# Altium PCB as5311-module.PcbDoc
Units mm, origin at the board's own origin, x right, y up, seen from the top; angles counter-clockwise.
Board outline 25 x 25 mm, 2 copper layers (Top Layer, Bottom Layer); 17 components, 19 nets, 107 pads, 14 vias.
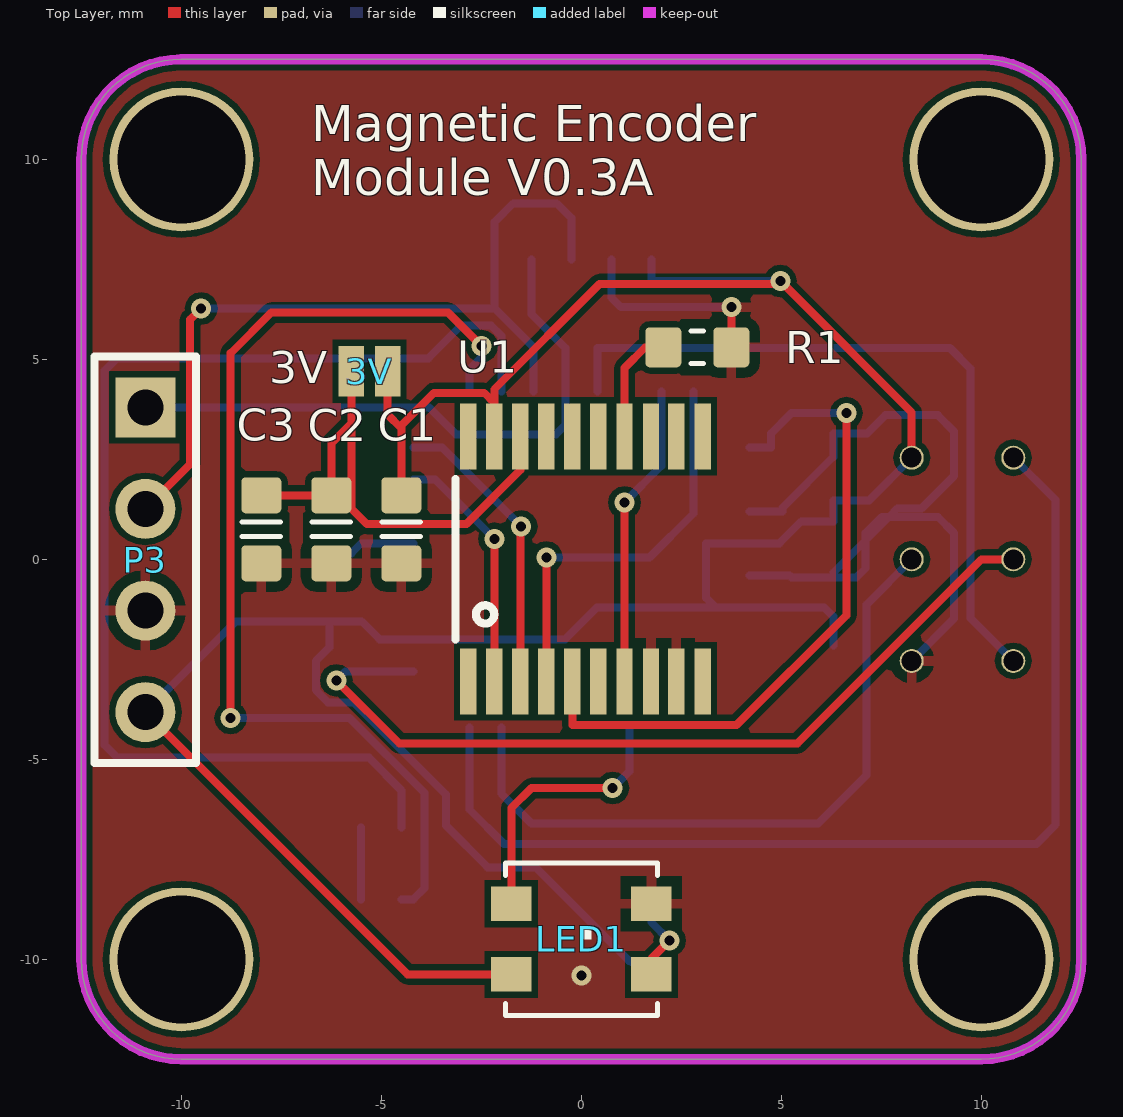
[diagram p0: Top Layer view]
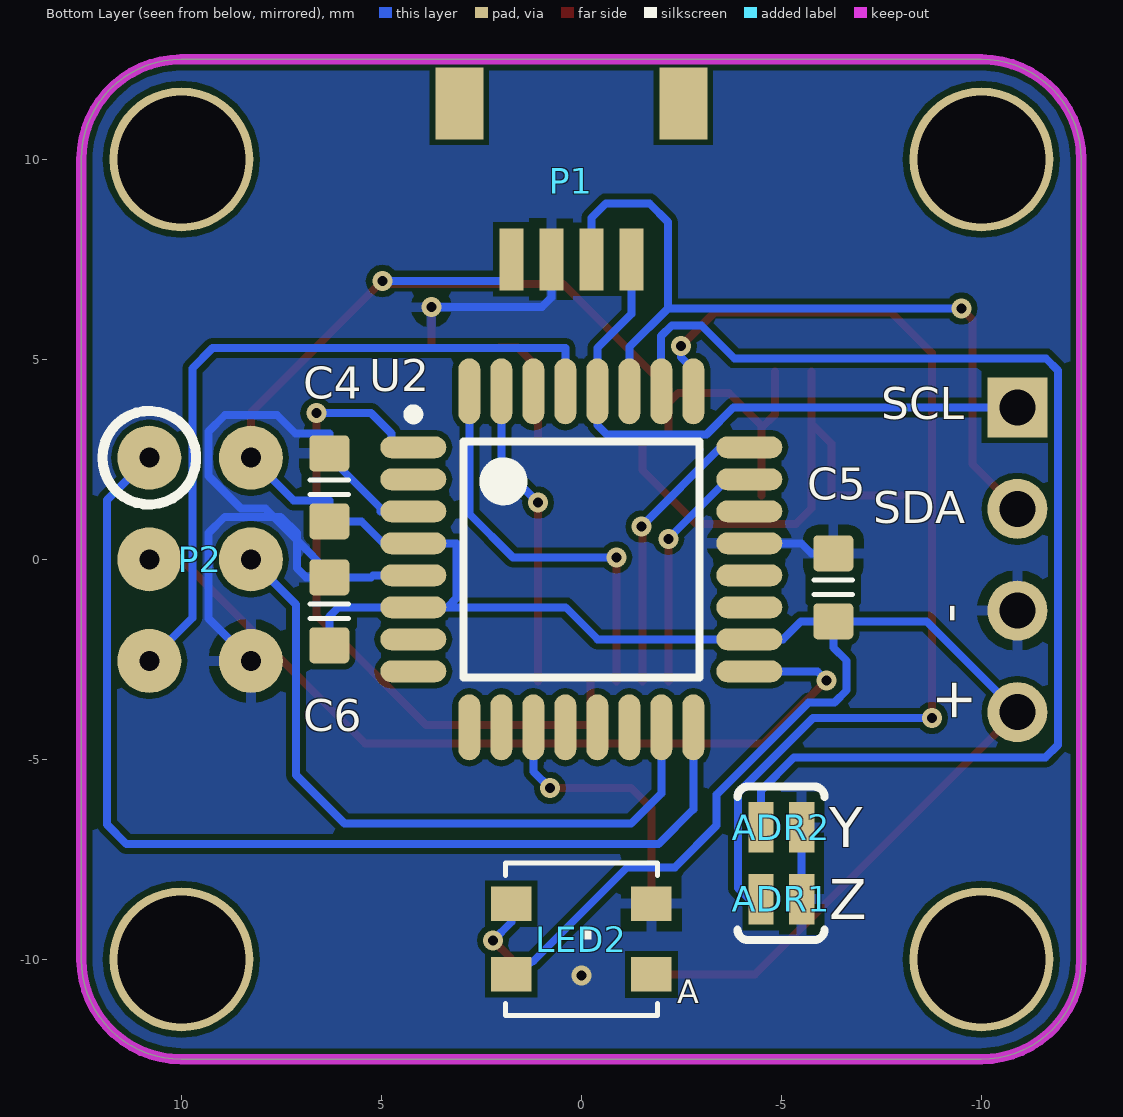
[diagram p1: Bottom Layer view, seen from below]
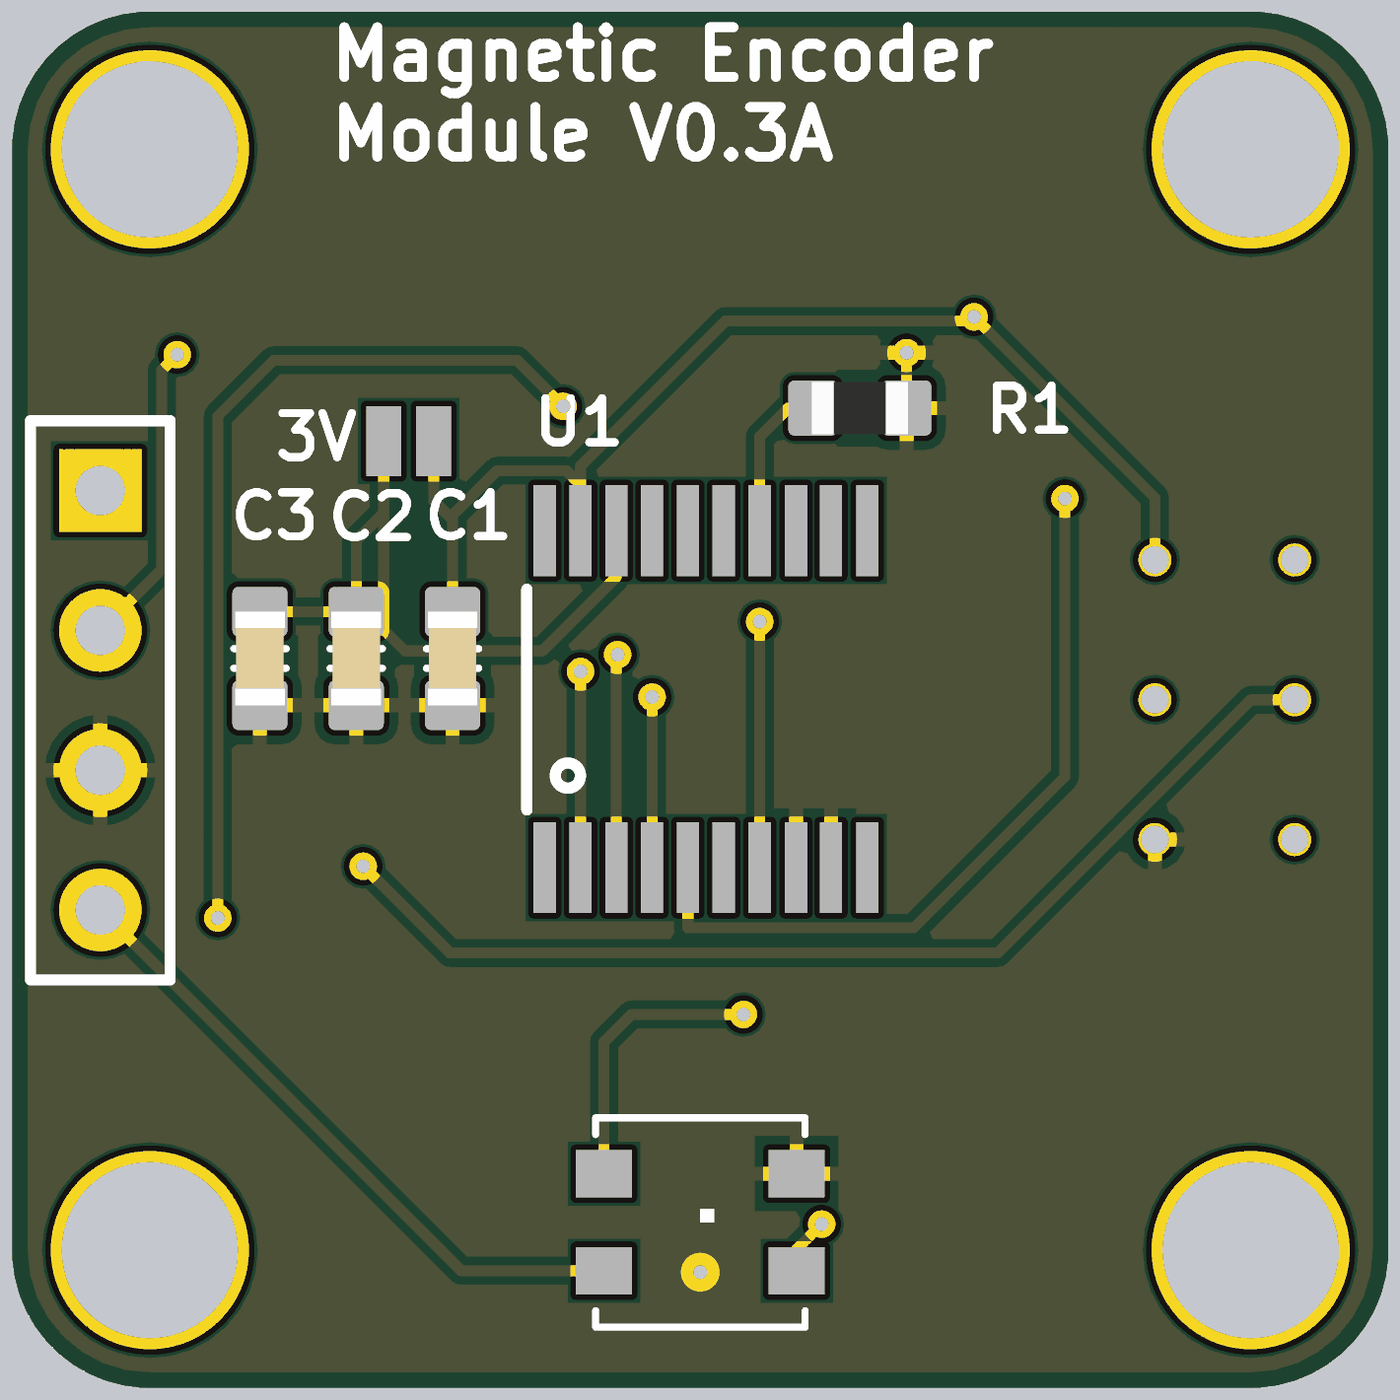
[diagram p2: 3D render of the assembled board from above, using the file's embedded part models]

## Layer stack, top to bottom
Top Solder: solder mask 0.0102, Solder Resist, Dk 3.5
Top Layer: signal copper 0.0356
Dielectric1: dielectric 0.32, FR-4, Dk 4.8
Bottom Layer: signal copper 0.0356
Bottom Solder: solder mask 0.0102, Solder Resist, Dk 3.5

## Board outline
-12.5,-10 -12.5,10 cw(c-10,10) -10,12.5 10,12.5 cw(c10,10) 12.5,10 12.5,-10 cw(c10,-10) 10,-12.5 -10,-12.5 cw(c-10,-10)

## Design rules (kind name [scope] priority, off if disabled: settings)
Clearance [All] p1: gap=0.15
FabricationTestPointUsage TestPointUsage [All] p1: valid=0 allowmultiple=FALSE
FabricationTestpoint Testpoint [All] p1: side=3 testpointundercomponent=TRUE minsize=1.016 maxsize=2.54 preferedsize=1.524 minholesize=0 maxholesize=1.016 preferedholesize=0.813 testpointgrid=0.025 allowsidetop=TRUE allowsidebottom=TRUE usegrid=TRUE gridtolerance=0
HoleSize [All] p1: absolutevalues=TRUE maxlimit=3.5 minlimit=0.025 maxpercent=80.000 minpercent=20.000
PolygonConnect [All] p1: connectstyle=Relief reliefconductorwidth=0.254 reliefentries=4 polygonreliefangle="90 Angle" airgapwidth=0.254
RoutingVias [All] p1: holewidth=0.25 width=0.5 viastyle="Through Hole" minholewidth=0.25 minwidth=0.5 maxholewidth=1 maxwidth=1.4
SilkToSolderMaskClearance SilkscreenOverComponentPads [IsPad] p1: minsilkscreentomaskgap=0.254 clearancetoexposedcopper=TRUE
SolderMaskExpansion [All] p1: expansion=0.102
Width [All] p1: maxlimit=1 minlimit=0.2 preferedwidth=0.2 minimp=50.000000 maximp=50.000000 favimp=50.000000
26 further rules are at their usual default settings.

## Classes and differential pairs
component class as5311-module: 3V ADR1 ADR2 C1 C2 C3 C4 C5 C6 LED1 LED2 P1 P3 R1 U1 U2

## Components (designator, comment, footprint, x,y, rotation, side; value= is the part's Value field where it differs from the comment)
3V "JUMPER-PAD-2-NO" PAD-JUMPER-2-NO_NO_SILK -5.3,4.7 r0 top
ADR1 "JUMPER-PAD-2-NC_BY_TRACE" PAD-JUMPER-2-NC_BY_TRACE_YES_SILK -5,-8.5 r0 bottom
ADR2 "JUMPER-PAD-2-NC_BY_TRACE" PAD-JUMPER-2-NC_BY_TRACE_YES_SILK -5,-6.7 r0 bottom
C1 "approved sub OK" CAPC1608X90N -4.5,0.75 r270 top
C2 "approved sub OK" CAPC1608X90N -6.25,0.75 r270 top
C3 "approved sub OK" CAPC1608X90N -8,0.75 r270 top
C4 "approved sub OK" CAPC1608X90N 6.3,1.8 r90 bottom
C5 "approved sub OK" CAPC1608X90N -6.3,-0.7 r90 bottom
C6 "approved sub OK" CAPC1608X90N 6.3,-1.3 r90 bottom
LED1 "WS2812B3535" LED3535 0,-9.5 r0 top
LED2 "WS2812B3535" LED3535 0,-9.5 r180 bottom
P1 "JST-SH 4P" SM04B-SRSS-TB 1.75,7.5 r90 bottom
P2 "ICSP" "ICSP Pads - SMD" 10.8,2.54 r180 bottom
P3 "Header 4" HDR1X4 -10.9,3.8 r270 top
R1 "Thick Film" RESC1608X55N 2.9,5.3 r0 top
U1 "AS5311" TSSOP-20 0.75,0 r0 top
U2 "ATmega328-AU" 32A_N 0,0 r180 bottom

## Footprints (in the part's own frame and the unit in brackets; to place one, negate y for a bottom-side part, rotate by r counter-clockwise, add the part's x,y. Pads: shape width x height; smd on the part's side, far side on the other; paste and mask are expansions set on the pad)
32A_N [mm] "Thin QFP, 32-Leads, Body 7x7mm, Pitch 0.8mm, IPC Medium Density"
  oval 1.65x0.55 smd: 1(-4.2,2.8) 2(-4.2,2) 3(-4.2,1.2) 4(-4.2,0.4) 5(-4.2,-0.4) 6(-4.2,-1.2) 7(-4.2,-2) 8(-4.2,-2.8) 17(4.2,-2.8) 18(4.2,-2) 19(4.2,-1.2) 20(4.2,-0.4) 21(4.2,0.4) 22(4.2,1.2) 23(4.2,2) 24(4.2,2.8)
  oval 0.55x1.65 smd: 9(-2.8,-4.2) 10(-2,-4.2) 11(-1.2,-4.2) 12(-0.4,-4.2) 13(0.4,-4.2) 14(1.2,-4.2) 15(2,-4.2) 16(2.8,-4.2) 25(2.8,4.2) 26(2,4.2) 27(1.2,4.2) 28(0.4,4.2) 29(-0.4,4.2) 30(-1.2,4.2) 31(-2,4.2) 32(-2.8,4.2)
  silkscreen extent -4.33,-2.95 2.95,3.75, body extent -3.5,-3.5 3.5,3.5, height 1.2
CAPC1608X90N [mm] "Chip Capacitor, Body 1.6x0.8mm, EIA 0603, IPC Medium Density"
  round 0.254 on Mech15: 0(0,0)
  rrect25% 0.9x1 smd: 1(-0.85,0) 2(0.85,0)
  Top Layer pour cut-out: -0.6,0.5 -0.4,0.7 0.4,0.7 0.6,0.5 0.6,-0.5 0.4,-0.7 -0.4,-0.7 -0.6,-0.5
  silkscreen extent -0.18,-0.48 0.18,0.48, body extent -0.85,-0.45 0.85,0.45, height 0.89
HDR1X4 [mm] "Connector; Header; 4 Position"
  rect 1.5x1.5 hole 0.9: 1(0,0)
  round 1.5 hole 0.9: 2(2.54,0) 3(5.08,0) 4(7.62,0)
  silkscreen extent -1.27,-1.27 8.89,1.27
"ICSP Pads - SMD" [mm]
  round 1.6 / inner round 1.6 / far side round 0.6 hole 0.5: 1(0,0) 2(2.54,0) 3(0,-2.54) 4(2.54,-2.54) 5(0,-5.08) 6(2.54,-5.08)
  silkscreen extent -1.17,-1.17 1.17,1.17
LED3535 [mil]
  rect 40x34 smd: 1(-68.9,35) 2(-68.9,-34.45) 3(69,-34.45) 4(69,35)
  silkscreen extent -75,-75 75,75
PAD-JUMPER-2-NC_BY_TRACE_YES_SILK [mm]
  rect 0.635x1.27 smd: 1(-0.508,0) 2(0.508,0)
  silkscreen extent -1.08,0.76 1.09,1.02
PAD-JUMPER-2-NO_NO_SILK [mm]
  rect 0.635x1.27 smd: 1(-0.45,0) 2(0.457,0)
RESC1608X55N [mm] "Chip Resistor, Body 1.6x0.8mm, EIA 0603, IPC Medium Density"
  round 0.254 on Mech15: 0(0,0)
  rrect25% 0.9x1 smd: 1(-0.85,0) 2(0.85,0)
  Top Layer pour cut-out: -0.6,0.5 -0.4,0.7 0.4,0.7 0.6,0.5 0.6,-0.5 0.4,-0.7 -0.4,-0.7 -0.6,-0.5
  silkscreen extent -0.15,-0.41 0.15,0.41, body extent -0.87,-0.47 0.88,0.48, height 0.54
SM04B-SRSS-TB [mm]
  rect 1.55x0.6 smd: 0(0,0) 1(0,-1) 2(0,-2) 3(0,-3)
  rect 1.8x1.2 smd: ""(3.9,-4.3) ""(3.9,1.3)
  body extent -0.55,-4.5 4.4,1.5, height 2.96
TSSOP-20 [mil]
  rect 16x65 smd: 1(-140.75,-120.08) 2(-115.16,-120.08) 3(-89.57,-120.08) 4(-63.98,-120.08) 5(-38.39,-120.08) 6(-12.8,-120.08) 7(13,-120.08) 8(39,-120.08) 9(64,-120.08) 10(90,-120.08) 11(90,121) 12(64,121) 13(39,121) 14(13,121) 15(-12.8,121) 16(-38.39,121) 17(-63.98,121) 18(-89.57,121) 19(-115.16,121) 20(-140.75,121)
  silkscreen extent -154,-79 -115,79

## Part data
C1 C2 C4 C5 C6: library part CAPC_100n_0603_X7R_50V_10%, "Capacitor SMD Cer 100nF 10% 50V X7R 0603"
C3: library part CAPC_1u_0603_X7R_16V_10%, "Capacitor SMD Cer 1uF 10% 16V X7R 0603"
P1: library part SM04B-SRSS-TB
P2: library part "Header 3X2", "Header, 3-Pin, Dual row"
P3: "Header, 4-Pin"
R1: library part RES_1K_0603_5%, "Resistor SMD chip 1k Ohm 0.1W 5% 0603"
U1: "AMS's AS5311 linear hall-effect encoder."
U2: "8-bit AVR Microcontroller, 32KB Flash, 1KB EEPROM, 2KB SRAM, 32-pin TQFP, Industrial Grade (-40°C to 85°C)"

## Free pads (board coordinates)
  round 3.6 hole 3.2: 0(-10,-10) 0(-10,10) 0(10,-10) 0(10,10)

## Via types
v1: diameter 0.5, hole 0.25, Top Layer to Bottom Layer, 14 vias

## Nets (pads, with @x,y where several pads share a name; then routed paths per layer and width w, separated by ;. In a path a pad name is that pad's centre, name@x,y a point inside that pad or via, vN(x,y) a via of type N, cw(c..) or ccw(c..) an arc to the next point about the centre after c; other vN are vias at no path point)
A: U1.4 U2.32 | length 10.3
  Top Layer w0.2: U1.4 v1(-0.875,0.048)
  Bottom Layer w0.2: v1(-0.875,0.048) 1.708,0.048 2.8,1.14 U2.32
ADR1: ADR1.2 U2.25 | length 26.1
  Top Layer w0.2: v1(-8.766,-3.966) -8.766,5.153 -7.75,6.169 -3.331,6.169 v1(-2.492,5.331)
  Bottom Layer w0.2: v1(-8.766,-3.966) -5.794,-3.966 -3.915,-5.845 -3.915,-8.215 -4.2,-8.5 ADR1.2 ; U2.25 -2.8,4.747 -2.492,5.054 v1(-2.492,5.331)
ADR2: ADR2.2 U2.26 | length 30.1
  Bottom Layer w0.2: ADR2.2 -4.492,-5.776 -5.312,-4.956 -11.6,-4.956 -11.916,-4.64 -11.916,4.721 -11.611,5.026 -3.825,5.026 -3,5.851 -2.264,5.851 -1.992,5.58 -1.992,4.838 -2,4.831 U2.26
B: U1.5 U2.1 | length 17.1
  Top Layer w0.2: U1.5 -0.225,-4.143 3.883,-4.143 6.626,-1.4 v1(6.626,3.654)
  Bottom Layer w0.2: U2.1 4.747,2.8 4.747,3.146 5.255,3.654 v1(6.626,3.654)
GND: ADR1.1 ADR2.1 C1.2 C2.2 C3.2 C4.2 C5.2 C6.2 LED1.4 LED2.4 P1.1 P2.6 P3.3 R1.2 U1.8 U1.9 U2.3 U2.5 U2.21 | length 31.1
  Top Layer w0.2: R1.2 v1(3.75,6.305)
  Bottom Layer w0.2: C5.2 -5.75,0.15 -5.5,0.4 U2.21 ; ADR1.1 ADR2.1 ; P1.1 0.75,6.542 0.987,6.305 v1(3.75,6.305) ; U2.5 5.204,-0.4 5.254,-0.45 C6.2 ; U2.3 5.026,1.2 5.026,1.288 6.3,2.562 C4.2 6.3,3.14 7.14,3.14 7.603,3.604 8.912,3.604 9.319,3.197 9.319,2.08 8.506,1.267 7.9,1.267 7.697,1.064 ; P2.6 9.319,-1.481 9.319,0.657 8.912,1.064 7.697,1.064 ; C6.2 6.88,-0.45 7.109,-0.221 7.109,0.475 ; C6.2 6.3,-0.333 7.109,0.475 ; 7.109,0.475 7.697,1.064 ; 7.109,0.475 7.109,0.657 7.515,1.064 7.697,1.064
  other v1: 0,-10.4
I: U1.7 U2.31 | length 7.6
  Top Layer w0.2: U1.7 v1(1.08,1.419)
  Bottom Layer w0.2: v1(1.08,1.419) 2,2.339 U2.31
MAGDECN: U1.3 U2.24 | length 7.4
  Top Layer w0.2: U1.3 -1.525,0.796 v1(-1.502,0.819)
  Bottom Layer w0.2: U2.24 -3.483,2.8 v1(-1.502,0.819)
MAGINCN: U1.2 U2.23 | length 6.2
  Top Layer w0.2: U1.2 v1(-2.175,0.514)
  Bottom Layer w0.2: U2.23 -3.661,2 v1(-2.175,0.514)
MISO: P2.1 U2.16 | length 26.9
  Bottom Layer w0.2: U2.16 -2.8,-6.249 -1.934,-7.115 11.376,-7.115 11.859,-6.633 11.859,1.481 P2.1
MOSI: P2.4 U2.15 | length 17.5
  Bottom Layer w0.2: U2.15 -2,-5.855 -1.248,-6.607 5.922,-6.607 7.134,-5.395 7.134,-1.126 P2.4
Net3V_1: 3V.1 C2.1 C3.1 U1.18 | length 13
  Top Layer w0.2: C3.1 C2.1 -6.25,2.892 -5.75,3.392 ; 3V.1 -5.75,3.392 ; U1.18 -1.525,2.234 -2.873,0.886 -5.363,0.886 -5.75,1.273 -5.75,3.392
NetLED1_3: LED1.3 LED2.1 | length 2.1
  Top Layer w0.2: LED1.3 1.753,-9.982 v1(2.207,-9.528)
  Bottom Layer w0.2: LED2.1 1.75,-9.072 v1(2.207,-9.528)
NetR1_1: R1.1 U1.14 | length 2.9
  Top Layer w0.2: U1.14 1.08,4.783 1.597,5.3 R1.1
RST: P2.5 U2.29 | length 18.4
  Bottom Layer w0.2: U2.29 0.4,5.28 9.217,5.28 9.725,4.772 9.725,-1.465 P2.5
SCK: P2.3 U2.17 | length 21.5
  Top Layer w0.2: v1(-6.125,-3.026) -4.55,-4.601 5.407,-4.601 10.008,0 P2.3
  Bottom Layer w0.2: v1(-6.125,-3.026) -5.899,-2.8 U2.17
SCL: P1.3 P3.1 U2.28 | length 15.4
  Bottom Layer w0.2: P3.1 -3.806,3.8 -3.127,3.121 -0.638,3.121 -0.4,3.359 U2.28 -0.4,5.28 -1.25,6.13 P1.3
SDA: P1.2 P3.2 U2.27 | length 20.9
  Top Layer w0.2: P3.2 -9.782,2.378 -9.782,5.991 v1(-9.503,6.271)
  Bottom Layer w0.2: v1(-9.503,6.271) -2.165,6.271 ; U2.27 -1.2,5.305 -2.165,6.271 ; P1.2 -0.25,8.531 -0.619,8.9 -1.7,8.9 -2.165,8.435 -2.165,6.271
VCC: 3V.2 C1.1 C4.1 C5.1 C6.1 LED1.2 LED2.2 P1.0 P2.2 P3.4 U1.19 U2.4 U2.6 U2.18 | length 78.1
  Top Layer w0.2: P3.4 -4.345,-10.375 LED1.2 ; 3V.2 -4.843,3.617 -4.5,3.275 ; C1.1 -4.5,3.275 ; U1.19 -2.175,3.908 ; v1(4.975,6.956) v1@5.051,6.88 ; P2.2 8.26,3.672 v1@5.051,6.88 ; -4.5,3.275 -4.5,3.349 -3.686,4.162 -2.429,4.162 -2.175,3.908 ; -2.175,3.908 -2.175,4.251 0.454,6.88 v1@5.051,6.88
  Bottom Layer w0.2: P3.4 -8.63,-1.55 C5.1 ; LED2.2 1.191,-10.036 -1.146,-7.699 -2.34,-7.699 -3.381,-6.658 -3.381,-5.884 -5.685,-3.58 -6.328,-3.58 -6.634,-3.273 -6.634,-2.538 -6.3,-2.203 C5.1 ; P1.0 1.75,6.956 v1(4.975,6.956) ; C6.1 6.3,-1.433 6.067,-1.2 U2.6 3.353,-1.2 ; P2.2 7.19,1.47 6.3,1.47 C4.1 5.5,0.95 4.95,0.4 U2.4 3.121,0.4 3.121,-0.968 3.353,-1.2 ; C5.1 -5.49,-1.55 -5.04,-2 U2.18 -0.41,-2 0.39,-1.2 3.353,-1.2
WS2812B: LED1.1 U2.11 | length 6.8
  Top Layer w0.2: LED1.1 -1.75,-6.22 -1.248,-5.718 v1(0.784,-5.718)
  Bottom Layer w0.2: v1(0.784,-5.718) 1.2,-5.302 U2.11
pads on no net: C1.0 C2.0 C3.0 C4.0 C5.0 C6.0 LED2.3 P1. R1.0 U1.1 U1.6 U1.10 U1.11 U1.12 U1.13 U1.15 U1.16 U1.17 U1.20 U2.2 U2.7 U2.8 U2.9 U2.10 U2.12 U2.13 U2.14 U2.19 U2.20 U2.22 U2.30

## Polygon pours and split planes (outlines as drawn)
GND on Bottom Layer "Bottom Layer-GND" (solid, pour order 0): 12.5,12.5 12.5,-12.5 -12.5,-12.5 -12.5,12.5
GND on Top Layer "Top VCC" (solid, pour order 2): 12.5,12.5 12.5,-12.5 -12.5,-12.5 -12.5,12.5

## Keep-outs
Keep-Out Layer:
  the board outline again, w0.254

## Silkscreen, mask and mechanical layers (free items; w line width, h text height)
Top Overlay:
  text "Magnetic Encoder / Module V0.3A" at -6.75,9.1 h0.9
  text "3V" at -7.8,4.4 h0.8
Bottom Overlay:
  text "SCL" at -7.5,3.5 h0.8
  text "SDA" at -7.3,0.9 h0.8
  text "-" at -8.9,-1.6 h1 r90
  text "+" at -8.9,-4.1 h1 r90
  text "Y" at -6.2,-7.2 h1
  text "Z" at -6.2,-9 h1
  text "A" at -2.4,-11.3 h1
Bottom Solder:
  rectangle: -5.3,-6.9 -4.8,-6.5
  rectangle: -5.3,-8.7 -4.8,-8.3
Mechanical 4:
  lines w0.254: 0,0 12.5,0
Mechanical 16:
  drawing of 1878 lines, arcs and shapes, not listed
  text "1" at -97.285,82.369 h1.78
  text "2" at -24.641,82.369 h1.78
  text "3" at 48.511,82.369 h1.78
  text "4" at 121.409,82.369 h1.78
  text "A" at -131.626,59.357 h1.78
  text "A" at 155.394,59.357 h1.78
  text "B" at -131.626,11.3 h1.78
  text "B" at 155.394,11.3 h1.78
  text "C" at -131.626,-37.214 h1.78
  text "C" at 155.394,-37.214 h1.78
  text "ENGINEER:" at 40.459,-74.222 h1.14
  text "TITLE:" at 78.559,-74.222 h1.14
  text "PCB DESIGNER:" at 40.459,-81.715 h1.14
  text "D" at -131.626,-85.22 h1.78
  text "D" at 155.394,-85.22 h1.78
  text "DATE:" at 40.459,-89.462 h1.14
  text "PART NO.:" at 78.559,-89.462 h1.14
  text "REV:" at 131.899,-89.462 h1.14
  text "Altium Limited" at 7.439,-92.002 h1.78
  text ".PRINT_DATE" at 41.729,-92.51 h1.78
  text "12a Rodborough Rd" at 7.439,-94.542 h1.78
  text "Frenchs Forest" at 7.439,-97.082 h1.78
  text "FILE NAME:" at 40.459,-97.082 h1.14
  text "DWG NO:" at 78.559,-97.082 h1.14
  text "SCALE:" at 131.899,-97.082 h1.14
  text "NSW 2086" at 7.439,-99.622 h1.78
  text ".PCB_FILE_NAME_NO_PATH" at 41.729,-100.13 h1.78
  text "1" at -97.285,-105.591 h1.78
  text "2" at -24.641,-105.591 h1.78
  text "3" at 48.511,-105.591 h1.78
  text "4" at 121.409,-105.591 h1.78

## Dimensions
-10,10 to 10,10 on Mechanical 13
-12.5,10 to 12.5,10 on Mechanical 13
-10,12.5 to -10,-12.5 on Mechanical 13